# Altium PCB PCB1.PcbDoc (part 2 of 3)
Units mm, origin at the board's own origin, x right, y up, seen from the top; angles counter-clockwise.
Board outline 100 x 100 mm, 2 copper layers (Top Layer, Bottom Layer); 16 components, 62 nets, 154 pads, 113 vias.
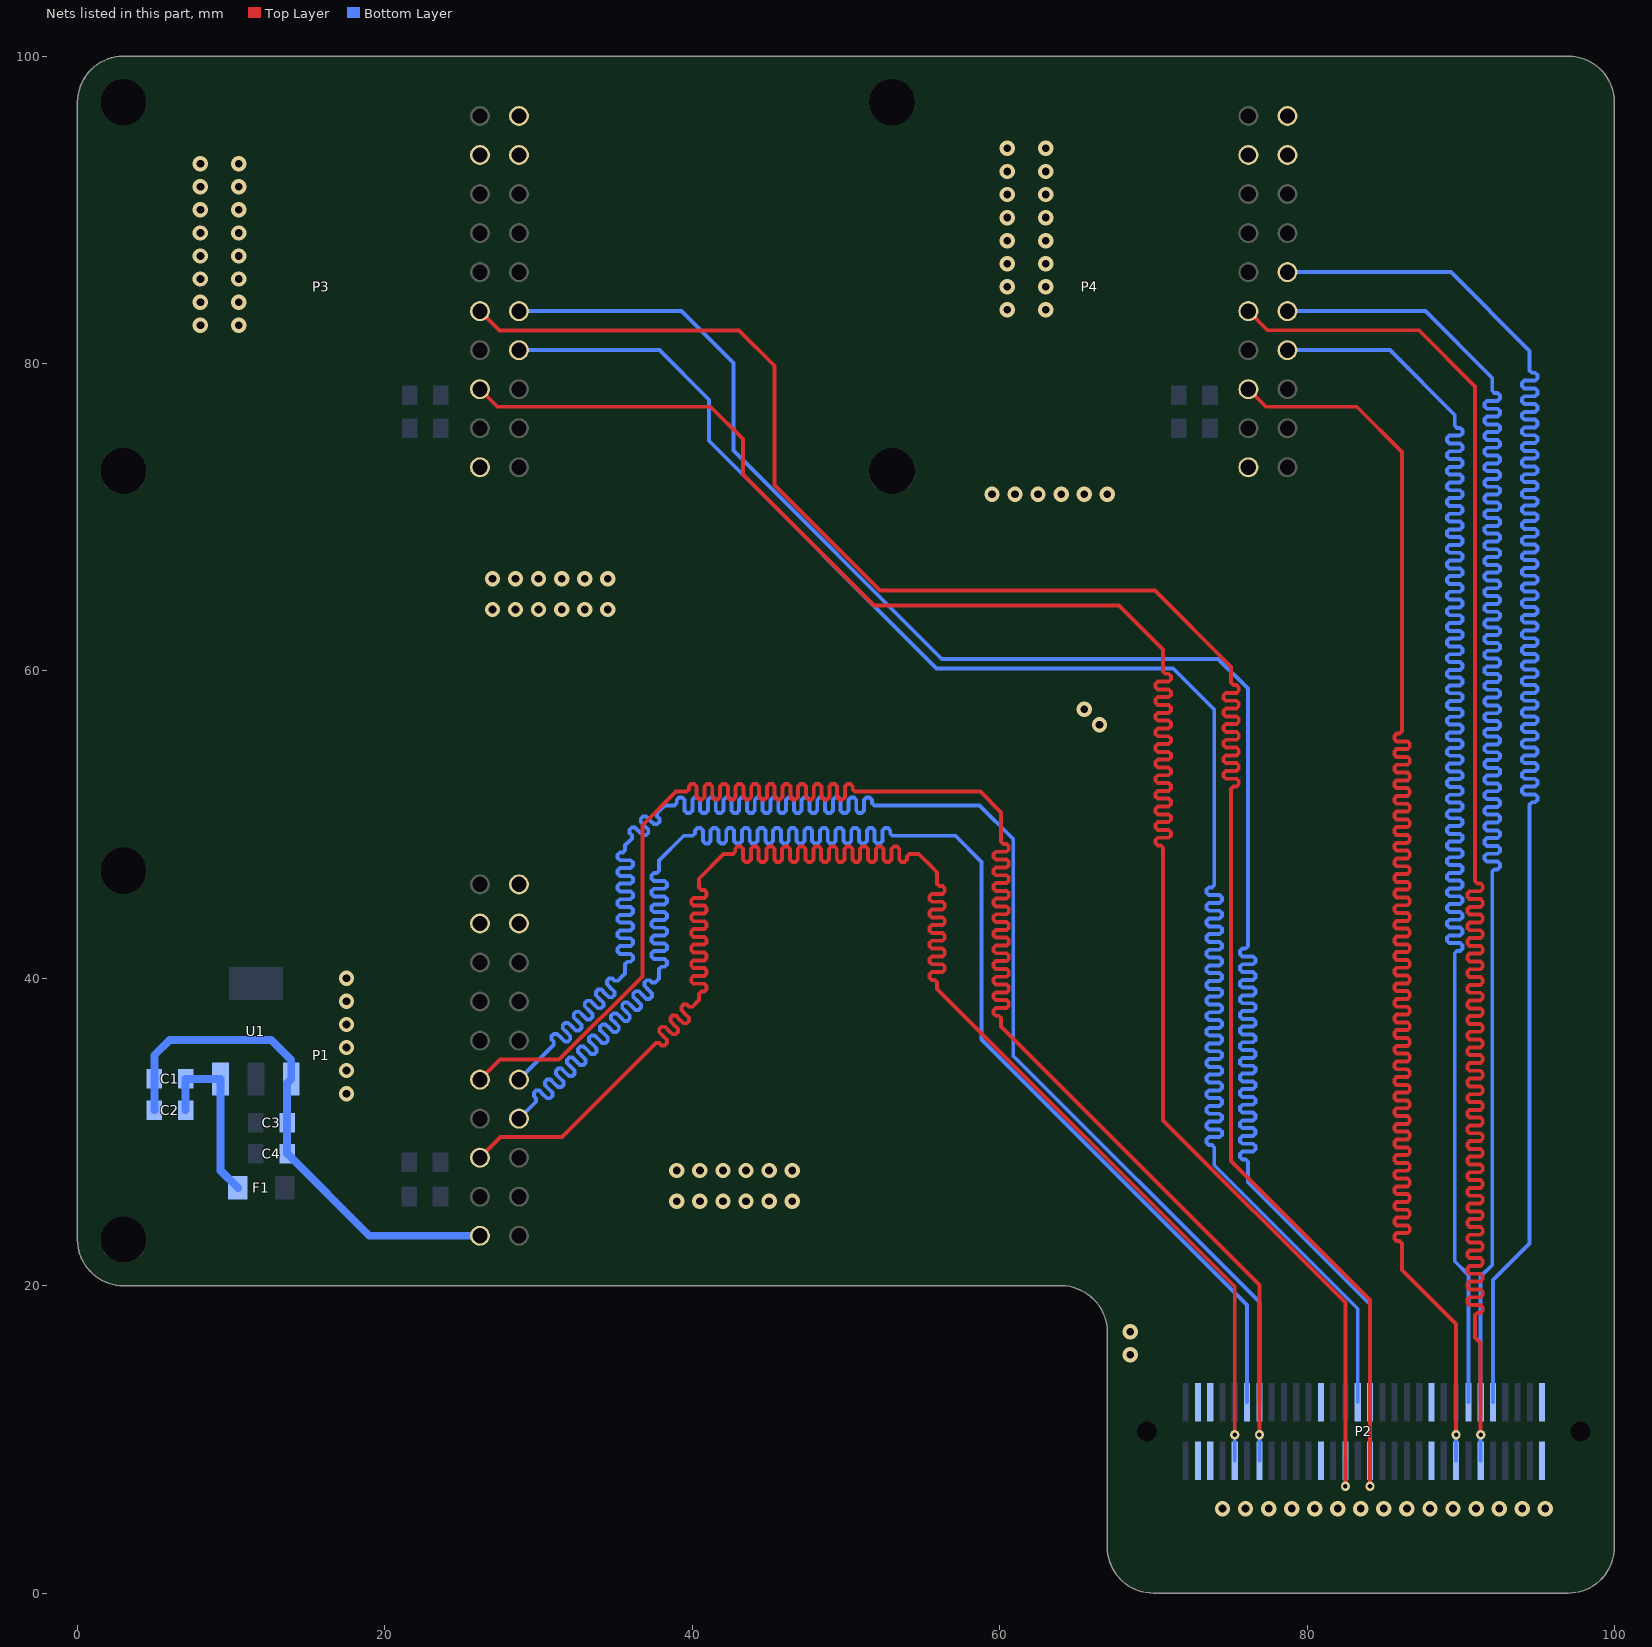
[diagram p2: the nets of this part, all layers, seen from the top]

## Via types
v1: diameter 1, hole 0.5, Top Layer to Bottom Layer, 87 vias
v2: diameter 0.6, hole 0.3, Top Layer to Bottom Layer, 22 vias
v3: diameter 0.8, hole 0.4, Top Layer to Bottom Layer, 2 vias
v4: diameter 3, hole 3, Top Layer to Bottom Layer, 2 vias

## Nets (pads, with @x,y where several pads share a name; then routed paths per layer and width w, separated by ;. In a path a pad name is that pad's centre, name@x,y a point inside that pad or via, vN(x,y) a via of type N, cw(c..) or ccw(c..) an arc to the next point about the centre after c; other vN are vias at no path point) (continued)
D5_3: P2.51 P4.11 | length 132.3
  Bottom Layer w0.254: P4.11@78.727,85.951 89.36,85.951 94.488,80.823 94.488,79.654 94.488,79.553 94.64,79.4 94.836,79.4 94.988,79.248 94.988,79.045 94.836,78.892 94.488,78.892 94.14,78.892 93.988,78.74 93.988,78.537 94.14,78.384 94.488,78.384 94.836,78.384 94.988,78.232 94.988,78.029 94.836,77.876 94.488,77.876 94.14,77.876 93.988,77.724 93.988,77.521 94.14,77.368 94.488,77.368 94.836,77.368 94.988,77.216 94.988,77.013 94.836,76.86 94.488,76.86 94.14,76.86 93.988,76.708 93.988,76.505 94.14,76.352 94.488,76.352 94.836,76.352 94.988,76.2 94.988,75.997 94.836,75.844 94.488,75.844 94.14,75.844 93.988,75.692 93.988,75.489 94.14,75.336 94.488,75.336 94.836,75.336 94.988,75.184 94.988,74.981 94.836,74.828 94.488,74.828 94.14,74.828 93.988,74.676 93.988,74.473 94.14,74.32 94.488,74.32 94.836,74.32 94.988,74.168 94.988,73.965 94.836,73.812 94.488,73.812 94.14,73.812 93.988,73.66 93.988,73.457 94.14,73.304 94.488,73.304 94.836,73.304 94.988,73.152 94.988,72.949 94.836,72.796 94.488,72.796 94.14,72.796 93.988,72.644 93.988,72.441 94.14,72.288 94.488,72.288 94.836,72.288 94.988,72.136 94.988,71.933 94.836,71.78 94.488,71.78 94.14,71.78 93.988,71.628 93.988,71.425 94.14,71.272 94.488,71.272 94.836,71.272 94.988,71.12 94.988,70.917 94.836,70.764 94.488,70.764 94.14,70.764 93.988,70.612 93.988,70.409 94.14,70.256 94.488,70.256 94.836,70.256 94.988,70.104 94.988,69.901 94.836,69.748 94.488,69.748 94.14,69.748 93.988,69.596 93.988,69.393 94.14,69.24 94.488,69.24 94.836,69.24 94.988,69.088 94.988,68.885 94.836,68.732 94.488,68.732 94.14,68.732 93.988,68.58 93.988,68.377 94.14,68.224 94.488,68.224 94.836,68.224 94.988,68.072 94.988,67.869 94.836,67.716 94.488,67.716 94.14,67.716 93.988,67.564 93.988,67.361 94.14,67.208 94.488,67.208 94.836,67.208 94.988,67.056 94.988,66.853 94.836,66.7 94.488,66.7 94.14,66.7 93.988,66.548 93.988,66.345 94.14,66.192 94.488,66.192 94.836,66.192 94.988,66.04 94.988,65.837 94.836,65.684 94.488,65.684 94.14,65.684 93.988,65.532 93.988,65.329 94.14,65.176 94.488,65.176 94.836,65.176 94.988,65.024 94.988,64.821 94.836,64.668 94.488,64.668 94.14,64.668 93.988,64.516 93.988,64.313 94.14,64.16 94.488,64.16 94.836,64.16 94.988,64.008 94.988,63.805 94.836,63.652 94.488,63.652 94.14,63.652 93.988,63.5 93.988,63.297 94.14,63.144 94.488,63.144 94.836,63.144 94.988,62.992 94.988,62.789 94.836,62.636 94.488,62.636 94.14,62.636 93.988,62.484 93.988,62.281 94.14,62.128 94.488,62.128 94.836,62.128 94.988,61.976 94.988,61.773 94.836,61.62 94.488,61.62 94.14,61.62 93.988,61.468 93.988,61.265 94.14,61.112 94.488,61.112 94.836,61.112 94.988,60.96 94.988,60.757 94.836,60.604 94.488,60.604 94.14,60.604 93.988,60.452 93.988,60.249 94.14,60.096 94.488,60.096 94.836,60.096 94.988,59.944 94.988,59.741 94.836,59.588 94.488,59.588 94.14,59.588 93.988,59.436 93.988,59.233 94.14,59.08 94.488,59.08 94.836,59.08 94.988,58.928 94.988,58.725 94.836,58.572 94.488,58.572 94.14,58.572 93.988,58.42 93.988,58.217 94.14,58.064 94.488,58.064 94.836,58.064 94.988,57.912 94.988,57.709 94.836,57.556 94.488,57.556 94.14,57.556 93.988,57.404 93.988,57.201 94.14,57.048 94.488,57.048 94.836,57.048 94.988,56.896 94.988,56.693 94.836,56.54 94.488,56.54 94.14,56.54 93.988,56.388 93.988,56.185 94.14,56.032 94.488,56.032 94.836,56.032 94.988,55.88 94.988,55.677 94.836,55.524 94.488,55.524 94.14,55.524 93.988,55.372 93.988,55.169 94.14,55.016 94.488,55.016 94.836,55.016 94.988,54.864 94.988,54.661 94.836,54.508 94.488,54.508 94.14,54.508 93.988,54.356 93.988,54.153 94.14,54 94.488,54 94.836,54 94.988,53.848 94.988,53.645 94.836,53.492 94.488,53.492 94.14,53.492 93.988,53.34 93.988,53.137 94.14,52.984 94.488,52.984 94.836,52.984 94.988,52.832 94.988,52.629 94.836,52.476 94.488,52.476 94.14,52.476 93.988,52.324 93.988,52.121 94.14,51.968 94.488,51.968 94.836,51.968 94.988,51.816 94.988,51.613 94.836,51.46 94.64,51.46 94.488,51.308 94.488,47.65 94.488,22.758 92.1,20.37 P2.51@92.1,12.425
D6_1: P1.10 P2.14 | length 132.1
  Top Layer w0.254: P1.10@26.187,33.411 27.498,34.722 31.344,34.722 36.754,40.132 36.754,49.962 38.938,52.146 39.522,52.146 39.624,52.146 39.776,52.299 39.776,52.494 39.929,52.646 40.132,52.646 40.284,52.494 40.284,52.146 40.284,51.799 40.437,51.646 40.64,51.646 40.792,51.799 40.792,52.146 40.792,52.494 40.945,52.646 41.148,52.646 41.3,52.494 41.3,52.146 41.3,51.799 41.453,51.646 41.656,51.646 41.808,51.799 41.808,52.146 41.808,52.494 41.961,52.646 42.164,52.646 42.316,52.494 42.316,52.146 42.316,51.799 42.469,51.646 42.672,51.646 42.824,51.799 42.824,52.146 42.824,52.494 42.977,52.646 43.18,52.646 43.332,52.494 43.332,52.146 43.332,51.799 43.485,51.646 43.688,51.646 43.84,51.799 43.84,52.146 43.84,52.494 43.993,52.646 44.196,52.646 44.348,52.494 44.348,52.146 44.348,51.799 44.501,51.646 44.704,51.646 44.856,51.799 44.856,52.146 44.856,52.494 45.009,52.646 45.212,52.646 45.364,52.494 45.364,52.146 45.364,51.799 45.517,51.646 45.72,51.646 45.872,51.799 45.872,52.146 45.872,52.494 46.025,52.646 46.228,52.646 46.38,52.494 46.38,52.146 46.38,51.799 46.533,51.646 46.736,51.646 46.888,51.799 46.888,52.146 46.888,52.494 47.041,52.646 47.244,52.646 47.396,52.494 47.396,52.146 47.396,51.799 47.549,51.646 47.752,51.646 47.904,51.799 47.904,52.146 47.904,52.494 48.057,52.646 48.26,52.646 48.412,52.494 48.412,52.146 48.412,51.799 48.565,51.646 48.768,51.646 48.92,51.799 48.92,52.146 48.92,52.494 49.073,52.646 49.276,52.646 49.428,52.494 49.428,52.146 49.428,51.799 49.581,51.646 49.784,51.646 49.936,51.799 49.936,52.146 49.936,52.494 50.089,52.646 50.292,52.646 50.444,52.494 50.444,52.299 50.597,52.146 53.289,52.146 58.75,52.146 60.096,50.8 60.096,49.555 60.096,48.895 60.249,48.743 60.444,48.743 60.596,48.59 60.596,48.387 60.444,48.235 60.096,48.235 59.749,48.235 59.596,48.082 59.596,47.879 59.749,47.727 60.096,47.727 60.444,47.727 60.596,47.574 60.596,47.371 60.444,47.219 60.096,47.219 59.749,47.219 59.596,47.066 59.596,46.863 59.749,46.711 60.096,46.711 60.444,46.711 60.596,46.558 60.596,46.355 60.444,46.203 60.096,46.203 59.749,46.203 59.596,46.05 59.596,45.847 59.749,45.695 60.096,45.695 60.444,45.695 60.596,45.542 60.596,45.339 60.444,45.187 60.096,45.187 59.749,45.187 59.596,45.034 59.596,44.831 59.749,44.679 60.096,44.679 60.444,44.679 60.596,44.526 60.596,44.323 60.444,44.171 60.096,44.171 59.749,44.171 59.596,44.018 59.596,43.815 59.749,43.663 60.096,43.663 60.444,43.663 60.596,43.51 60.596,43.307 60.444,43.155 60.096,43.155 59.749,43.155 59.596,43.002 59.596,42.799 59.749,42.647 60.096,42.647 60.444,42.647 60.596,42.494 60.596,42.291 60.444,42.139 60.096,42.139 59.749,42.139 59.596,41.986 59.596,41.783 59.749,41.631 60.096,41.631 60.444,41.631 60.596,41.478 60.596,41.275 60.444,41.123 60.096,41.123 59.749,41.123 59.596,40.97 59.596,40.767 59.749,40.615 60.096,40.615 60.444,40.615 60.596,40.462 60.596,40.259 60.444,40.107 60.096,40.107 59.749,40.107 59.596,39.954 59.596,39.751 59.749,39.599 60.096,39.599 60.444,39.599 60.596,39.446 60.596,39.243 60.444,39.091 60.096,39.091 59.749,39.091 59.596,38.938 59.596,38.735 59.749,38.583 60.096,38.583 60.444,38.583 60.596,38.43 60.596,38.227 60.444,38.075 60.096,38.075 59.749,38.075 59.596,37.922 59.596,37.719 59.749,37.567 59.944,37.567 60.096,37.414 60.096,37.313 60.096,36.855 76.9,20.052 v2(76.9,10.302)
  Bottom Layer w0.254: P2.14@76.9,8.625 v2(76.9,10.302)
D6_2: P2.32 P3.10 | length 132.3
  Top Layer w0.254: P3.10@26.187,83.411 27.455,82.144 43.053,82.144 45.339,79.858 45.339,72.092 52.204,65.227 70.104,65.227 75.057,60.274 75.057,59.334 75.057,59.233 75.209,59.08 75.405,59.08 75.557,58.928 75.557,58.725 75.405,58.572 75.057,58.572 74.709,58.572 74.557,58.42 74.557,58.217 74.709,58.064 75.057,58.064 75.405,58.064 75.557,57.912 75.557,57.709 75.405,57.556 75.057,57.556 74.709,57.556 74.557,57.404 74.557,57.201 74.709,57.048 75.057,57.048 75.405,57.048 75.557,56.896 75.557,56.693 75.405,56.54 75.057,56.54 74.709,56.54 74.557,56.388 74.557,56.185 74.709,56.032 75.057,56.032 75.405,56.032 75.557,55.88 75.557,55.677 75.405,55.524 75.057,55.524 74.709,55.524 74.557,55.372 74.557,55.169 74.709,55.016 75.057,55.016 75.405,55.016 75.557,54.864 75.557,54.661 75.405,54.508 75.057,54.508 74.709,54.508 74.557,54.356 74.557,54.153 74.709,54 75.057,54 75.405,54 75.557,53.848 75.557,53.645 75.405,53.492 75.057,53.492 74.709,53.492 74.557,53.34 74.557,53.137 74.709,52.984 75.057,52.984 75.405,52.984 75.557,52.832 75.557,52.629 75.405,52.476 75.209,52.476 75.057,52.324 75.057,50.114 75.057,28.118 84.1,19.075 v2(84.1,6.948)
  Bottom Layer w0.254: v2(84.1,6.948) P2.32@84.1,8.625
D6_3: P2.50 P4.10 | length 131.8
  Top Layer w0.254: P4.10@76.187,83.411 77.43,82.169 87.274,82.169 90.932,78.511 90.932,48.285 90.932,46.33 91.084,46.177 91.28,46.177 91.432,46.025 91.432,45.822 91.28,45.669 90.932,45.669 90.584,45.669 90.432,45.517 90.432,45.314 90.584,45.161 90.932,45.161 91.28,45.161 91.432,45.009 91.432,44.806 91.28,44.653 90.932,44.653 90.584,44.653 90.432,44.501 90.432,44.298 90.584,44.145 90.932,44.145 91.28,44.145 91.432,43.993 91.432,43.79 91.28,43.637 90.932,43.637 90.584,43.637 90.432,43.485 90.432,43.282 90.584,43.129 90.932,43.129 91.28,43.129 91.432,42.977 91.432,42.774 91.28,42.621 90.932,42.621 90.584,42.621 90.432,42.469 90.432,42.266 90.584,42.113 90.932,42.113 91.28,42.113 91.432,41.961 91.432,41.758 91.28,41.605 90.932,41.605 90.584,41.605 90.432,41.453 90.432,41.25 90.584,41.097 90.932,41.097 91.28,41.097 91.432,40.945 91.432,40.742 91.28,40.589 90.932,40.589 90.584,40.589 90.432,40.437 90.432,40.234 90.584,40.081 90.932,40.081 91.28,40.081 91.432,39.929 91.432,39.726 91.28,39.573 90.932,39.573 90.584,39.573 90.432,39.421 90.432,39.218 90.584,39.065 90.932,39.065 91.28,39.065 91.432,38.913 91.432,38.71 91.28,38.557 90.932,38.557 90.584,38.557 90.432,38.405 90.432,38.202 90.584,38.049 90.932,38.049 91.28,38.049 91.432,37.897 91.432,37.694 91.28,37.541 90.932,37.541 90.584,37.541 90.432,37.389 90.432,37.186 90.584,37.033 90.932,37.033 91.28,37.033 91.432,36.881 91.432,36.678 91.28,36.525 90.932,36.525 90.584,36.525 90.432,36.373 90.432,36.17 90.584,36.017 90.932,36.017 91.28,36.017 91.432,35.865 91.432,35.662 91.28,35.509 90.932,35.509 90.584,35.509 90.432,35.357 90.432,35.154 90.584,35.001 90.932,35.001 91.28,35.001 91.432,34.849 91.432,34.646 91.28,34.493 90.932,34.493 90.584,34.493 90.432,34.341 90.432,34.138 90.584,33.985 90.932,33.985 91.28,33.985 91.432,33.833 91.432,33.63 91.28,33.477 90.932,33.477 90.584,33.477 90.432,33.325 90.432,33.122 90.584,32.969 90.932,32.969 91.28,32.969 91.432,32.817 91.432,32.614 91.28,32.461 90.932,32.461 90.584,32.461 90.432,32.309 90.432,32.106 90.584,31.953 90.932,31.953 91.28,31.953 91.432,31.801 91.432,31.598 91.28,31.445 90.932,31.445 90.584,31.445 90.432,31.293 90.432,31.09 90.584,30.937 90.932,30.937 91.28,30.937 91.432,30.785 91.432,30.582 91.28,30.429 90.932,30.429 90.584,30.429 90.432,30.277 90.432,30.074 90.584,29.921 90.932,29.921 91.28,29.921 91.432,29.769 91.432,29.566 91.28,29.413 90.932,29.413 90.584,29.413 90.432,29.261 90.432,29.058 90.584,28.905 90.932,28.905 91.28,28.905 91.432,28.753 91.432,28.55 91.28,28.397 90.932,28.397 90.584,28.397 90.432,28.245 90.432,28.042 90.584,27.889 90.932,27.889 91.28,27.889 91.432,27.737 91.432,27.534 91.28,27.381 90.932,27.381 90.584,27.381 90.432,27.229 90.432,27.026 90.584,26.873 90.932,26.873 91.28,26.873 91.432,26.721 91.432,26.518 91.28,26.365 90.932,26.365 90.584,26.365 90.432,26.213 90.432,26.01 90.584,25.857 90.932,25.857 91.28,25.857 91.432,25.705 91.432,25.502 91.28,25.349 90.932,25.349 90.584,25.349 90.432,25.197 90.432,24.994 90.584,24.841 90.932,24.841 91.28,24.841 91.432,24.689 91.432,24.486 91.28,24.333 90.932,24.333 90.584,24.333 90.432,24.181 90.432,23.978 90.584,23.825 90.932,23.825 91.28,23.825 91.432,23.673 91.432,23.47 91.28,23.317 90.932,23.317 90.584,23.317 90.432,23.165 90.432,22.962 90.584,22.809 90.932,22.809 91.28,22.809 91.432,22.657 91.432,22.454 91.28,22.301 90.932,22.301 90.584,22.301 90.432,22.149 90.432,21.946 90.584,21.793 90.932,21.793 91.28,21.793 91.432,21.641 91.432,21.438 91.28,21.285 90.932,21.285 90.584,21.285 90.432,21.133 90.432,20.93 90.584,20.777 90.932,20.777 91.28,20.777 91.432,20.625 91.432,20.422 91.28,20.269 90.932,20.269 90.584,20.269 90.432,20.117 90.432,19.914 90.584,19.761 90.932,19.761 91.28,19.761 91.432,19.609 91.432,19.406 91.28,19.253 90.932,19.253 90.584,19.253 90.432,19.101 90.432,18.898 90.584,18.745 90.932,18.745 91.28,18.745 91.432,18.593 91.432,18.39 91.28,18.237 91.084,18.237 90.932,18.085 90.932,17.729 90.932,17.475 90.932,16.636 91.3,16.268 v2(91.3,10.302)
  Bottom Layer w0.254: P2.50@91.3,8.625 v2(91.3,10.302)
D7_1: P1.9 P2.13 | length 132.3
  Bottom Layer w0.254: P1.9@28.727,33.411 30.919,35.603 30.991,35.675 30.991,35.891 30.853,36.029 30.853,36.244 30.997,36.388 31.212,36.388 31.458,36.142 31.704,35.896 31.92,35.896 32.063,36.04 32.063,36.255 31.817,36.501 31.572,36.747 31.572,36.963 31.715,37.106 31.931,37.106 32.177,36.86 32.422,36.615 32.638,36.615 32.782,36.758 32.782,36.974 32.536,37.22 32.29,37.465 32.29,37.681 32.434,37.825 32.649,37.825 32.895,37.579 33.141,37.333 33.356,37.333 33.5,37.477 33.5,37.692 33.254,37.938 33.008,38.184 33.008,38.399 33.152,38.543 33.368,38.543 33.613,38.297 33.859,38.051 34.075,38.051 34.218,38.195 34.218,38.411 33.973,38.656 33.727,38.902 33.727,39.118 33.871,39.261 34.086,39.261 34.332,39.016 34.578,38.77 34.793,38.77 34.937,38.914 34.937,39.129 34.691,39.375 34.445,39.621 34.445,39.836 34.589,39.98 34.805,39.98 34.943,39.842 35.158,39.842 35.41,40.093 35.636,40.32 35.636,40.574 35.636,40.93 35.789,41.082 35.984,41.082 36.136,41.234 36.136,41.438 35.984,41.59 35.636,41.59 35.289,41.59 35.136,41.742 35.136,41.946 35.289,42.098 35.636,42.098 35.984,42.098 36.136,42.25 36.136,42.454 35.984,42.606 35.636,42.606 35.289,42.606 35.136,42.758 35.136,42.962 35.289,43.114 35.636,43.114 35.984,43.114 36.136,43.266 36.136,43.47 35.984,43.622 35.636,43.622 35.289,43.622 35.136,43.774 35.136,43.978 35.289,44.13 35.636,44.13 35.984,44.13 36.136,44.282 36.136,44.486 35.984,44.638 35.636,44.638 35.289,44.638 35.136,44.79 35.136,44.994 35.289,45.146 35.636,45.146 35.984,45.146 36.136,45.298 36.136,45.502 35.984,45.654 35.636,45.654 35.289,45.654 35.136,45.806 35.136,46.01 35.289,46.162 35.636,46.162 35.984,46.162 36.136,46.314 36.136,46.518 35.984,46.67 35.636,46.67 35.289,46.67 35.136,46.822 35.136,47.026 35.289,47.178 35.636,47.178 35.984,47.178 36.136,47.33 36.136,47.534 35.984,47.686 35.636,47.686 35.289,47.686 35.136,47.838 35.136,48.042 35.289,48.194 35.484,48.194 35.636,48.346 35.636,48.666 35.816,48.846 36.067,49.097 36.067,49.313 35.929,49.451 35.929,49.667 36.073,49.81 36.288,49.81 36.534,49.564 36.78,49.319 36.996,49.319 37.139,49.462 37.139,49.678 36.893,49.924 36.648,50.169 36.648,50.385 36.791,50.529 37.007,50.529 37.253,50.283 37.498,50.037 37.714,50.037 37.858,50.181 37.858,50.396 37.72,50.534 37.72,50.75 37.971,51.001 38.227,51.257 38.481,51.257 38.837,51.257 38.989,51.41 38.989,51.605 39.141,51.757 39.345,51.757 39.497,51.605 39.497,51.257 39.497,50.91 39.649,50.757 39.853,50.757 40.005,50.91 40.005,51.257 40.005,51.605 40.157,51.757 40.361,51.757 40.513,51.605 40.513,51.257 40.513,50.91 40.665,50.757 40.869,50.757 41.021,50.91 41.021,51.257 41.021,51.605 41.173,51.757 41.377,51.757 41.529,51.605 41.529,51.257 41.529,50.91 41.681,50.757 41.885,50.757 42.037,50.91 42.037,51.257 42.037,51.605 42.189,51.757 42.393,51.757 42.545,51.605 42.545,51.257 42.545,50.91 42.697,50.757 42.901,50.757 43.053,50.91 43.053,51.257 43.053,51.605 43.205,51.757 43.409,51.757 43.561,51.605 43.561,51.257 43.561,50.91 43.713,50.757 43.917,50.757 44.069,50.91 44.069,51.257 44.069,51.605 44.221,51.757 44.425,51.757 44.577,51.605 44.577,51.257 44.577,50.91 44.729,50.757 44.933,50.757 45.085,50.91 45.085,51.257 45.085,51.605 45.237,51.757 45.441,51.757 45.593,51.605 45.593,51.257 45.593,50.91 45.745,50.757 45.949,50.757 46.101,50.91 46.101,51.257 46.101,51.605 46.253,51.757 46.457,51.757 46.609,51.605 46.609,51.257 46.609,50.91 46.761,50.757 46.965,50.757 47.117,50.91 47.117,51.257 47.117,51.605 47.269,51.757 47.473,51.757 47.625,51.605 47.625,51.257 47.625,50.91 47.777,50.757 47.981,50.757 48.133,50.91 48.133,51.257 48.133,51.605 48.285,51.757 48.489,51.757 48.641,51.605 48.641,51.257 48.641,50.91 48.793,50.757 48.997,50.757 49.149,50.91 49.149,51.257 49.149,51.605 49.301,51.757 49.505,51.757 49.657,51.605 49.657,51.257 49.657,50.91 49.809,50.757 50.013,50.757 50.165,50.91 50.165,51.257 50.165,51.605 50.317,51.757 50.521,51.757 50.673,51.605 50.673,51.257 50.673,50.91 50.825,50.757 51.029,50.757 51.181,50.91 51.181,51.257 51.181,51.605 51.333,51.757 51.537,51.757 51.689,51.605 51.689,51.41 51.841,51.257 55.982,51.257 58.699,51.257 60.884,49.073 60.884,34.95 76.9,18.934 P2.13@76.9,12.425
D7_2: P2.31 P3.9 | length 132.6
  Bottom Layer w0.254: P3.9@28.727,83.411 39.296,83.411 42.672,80.035 42.672,74.346 56.236,60.782 74.219,60.782 76.149,58.852 76.149,42.723 76.149,42.088 75.997,41.935 75.802,41.935 75.649,41.783 75.649,41.58 75.802,41.427 76.149,41.427 76.497,41.427 76.649,41.275 76.649,41.072 76.497,40.919 76.149,40.919 75.802,40.919 75.649,40.767 75.649,40.564 75.802,40.411 76.149,40.411 76.497,40.411 76.649,40.259 76.649,40.056 76.497,39.903 76.149,39.903 75.802,39.903 75.649,39.751 75.649,39.548 75.802,39.395 76.149,39.395 76.497,39.395 76.649,39.243 76.649,39.04 76.497,38.887 76.149,38.887 75.802,38.887 75.649,38.735 75.649,38.532 75.802,38.379 76.149,38.379 76.497,38.379 76.649,38.227 76.649,38.024 76.497,37.871 76.149,37.871 75.802,37.871 75.649,37.719 75.649,37.516 75.802,37.363 76.149,37.363 76.497,37.363 76.649,37.211 76.649,37.008 76.497,36.855 76.149,36.855 75.802,36.855 75.649,36.703 75.649,36.5 75.802,36.347 76.149,36.347 76.497,36.347 76.649,36.195 76.649,35.992 76.497,35.839 76.149,35.839 75.802,35.839 75.649,35.687 75.649,35.484 75.802,35.331 76.149,35.331 76.497,35.331 76.649,35.179 76.649,34.976 76.497,34.823 76.149,34.823 75.802,34.823 75.649,34.671 75.649,34.468 75.802,34.315 76.149,34.315 76.497,34.315 76.649,34.163 76.649,33.96 76.497,33.807 76.149,33.807 75.802,33.807 75.649,33.655 75.649,33.452 75.802,33.299 76.149,33.299 76.497,33.299 76.649,33.147 76.649,32.944 76.497,32.791 76.149,32.791 75.802,32.791 75.649,32.639 75.649,32.436 75.802,32.283 76.149,32.283 76.497,32.283 76.649,32.131 76.649,31.928 76.497,31.775 76.149,31.775 75.802,31.775 75.649,31.623 75.649,31.42 75.802,31.267 76.149,31.267 76.497,31.267 76.649,31.115 76.649,30.912 76.497,30.759 76.149,30.759 75.802,30.759 75.649,30.607 75.649,30.404 75.802,30.251 76.149,30.251 76.497,30.251 76.649,30.099 76.649,29.896 76.497,29.743 76.149,29.743 75.802,29.743 75.649,29.591 75.649,29.388 75.802,29.235 76.149,29.235 76.497,29.235 76.649,29.083 76.649,28.88 76.497,28.727 76.149,28.727 75.802,28.727 75.649,28.575 75.649,28.372 75.802,28.219 75.997,28.219 76.149,28.067 76.149,27.965 76.149,26.746 84.1,18.795 P2.31@84.1,12.425
D7_3: P2.49 P4.9 | length 132
  Bottom Layer w0.254: P4.9@78.727,83.411 87.709,83.411 92.05,79.07 92.05,78.334 92.05,78.232 92.202,78.08 92.397,78.08 92.55,77.927 92.55,77.724 92.397,77.572 92.05,77.572 91.702,77.572 91.55,77.419 91.55,77.216 91.702,77.064 92.05,77.064 92.397,77.064 92.55,76.911 92.55,76.708 92.397,76.556 92.05,76.556 91.702,76.556 91.55,76.403 91.55,76.2 91.702,76.048 92.05,76.048 92.397,76.048 92.55,75.895 92.55,75.692 92.397,75.54 92.05,75.54 91.702,75.54 91.55,75.387 91.55,75.184 91.702,75.032 92.05,75.032 92.397,75.032 92.55,74.879 92.55,74.676 92.397,74.524 92.05,74.524 91.702,74.524 91.55,74.371 91.55,74.168 91.702,74.016 92.05,74.016 92.397,74.016 92.55,73.863 92.55,73.66 92.397,73.508 92.05,73.508 91.702,73.508 91.55,73.355 91.55,73.152 91.702,73 92.05,73 92.397,73 92.55,72.847 92.55,72.644 92.397,72.492 92.05,72.492 91.702,72.492 91.55,72.339 91.55,72.136 91.702,71.984 92.05,71.984 92.397,71.984 92.55,71.831 92.55,71.628 92.397,71.476 92.05,71.476 91.702,71.476 91.55,71.323 91.55,71.12 91.702,70.968 92.05,70.968 92.397,70.968 92.55,70.815 92.55,70.612 92.397,70.46 92.05,70.46 91.702,70.46 91.55,70.307 91.55,70.104 91.702,69.952 92.05,69.952 92.397,69.952 92.55,69.799 92.55,69.596 92.397,69.444 92.05,69.444 91.702,69.444 91.55,69.291 91.55,69.088 91.702,68.936 92.05,68.936 92.397,68.936 92.55,68.783 92.55,68.58 92.397,68.428 92.05,68.428 91.702,68.428 91.55,68.275 91.55,68.072 91.702,67.92 92.05,67.92 92.397,67.92 92.55,67.767 92.55,67.564 92.397,67.412 92.05,67.412 91.702,67.412 91.55,67.259 91.55,67.056 91.702,66.904 92.05,66.904 92.397,66.904 92.55,66.751 92.55,66.548 92.397,66.396 92.05,66.396 91.702,66.396 91.55,66.243 91.55,66.04 91.702,65.888 92.05,65.888 92.397,65.888 92.55,65.735 92.55,65.532 92.397,65.38 92.05,65.38 91.702,65.38 91.55,65.227 91.55,65.024 91.702,64.872 92.05,64.872 92.397,64.872 92.55,64.719 92.55,64.516 92.397,64.364 92.05,64.364 91.702,64.364 91.55,64.211 91.55,64.008 91.702,63.856 92.05,63.856 92.397,63.856 92.55,63.703 92.55,63.5 92.397,63.348 92.05,63.348 91.702,63.348 91.55,63.195 91.55,62.992 91.702,62.84 92.05,62.84 92.397,62.84 92.55,62.687 92.55,62.484 92.397,62.332 92.05,62.332 91.702,62.332 91.55,62.179 91.55,61.976 91.702,61.824 92.05,61.824 92.397,61.824 92.55,61.671 92.55,61.468 92.397,61.316 92.05,61.316 91.702,61.316 91.55,61.163 91.55,60.96 91.702,60.808 92.05,60.808 92.397,60.808 92.55,60.655 92.55,60.452 92.397,60.3 92.05,60.3 91.702,60.3 91.55,60.147 91.55,59.944 91.702,59.792 92.05,59.792 92.397,59.792 92.55,59.639 92.55,59.436 92.397,59.284 92.05,59.284 91.702,59.284 91.55,59.131 91.55,58.928 91.702,58.776 92.05,58.776 92.397,58.776 92.55,58.623 92.55,58.42 92.397,58.268 92.05,58.268 91.702,58.268 91.55,58.115 91.55,57.912 91.702,57.76 92.05,57.76 92.397,57.76 92.55,57.607 92.55,57.404 92.397,57.252 92.05,57.252 91.702,57.252 91.55,57.099 91.55,56.896 91.702,56.744 92.05,56.744 92.397,56.744 92.55,56.591 92.55,56.388 92.397,56.236 92.05,56.236 91.702,56.236 91.55,56.083 91.55,55.88 91.702,55.728 92.05,55.728 92.397,55.728 92.55,55.575 92.55,55.372 92.397,55.22 92.05,55.22 91.702,55.22 91.55,55.067 91.55,54.864 91.702,54.712 92.05,54.712 92.397,54.712 92.55,54.559 92.55,54.356 92.397,54.204 92.05,54.204 91.702,54.204 91.55,54.051 91.55,53.848 91.702,53.696 92.05,53.696 92.397,53.696 92.55,53.543 92.55,53.34 92.397,53.188 92.05,53.188 91.702,53.188 91.55,53.035 91.55,52.832 91.702,52.68 92.05,52.68 92.397,52.68 92.55,52.527 92.55,52.324 92.397,52.172 92.05,52.172 91.702,52.172 91.55,52.019 91.55,51.816 91.702,51.664 92.05,51.664 92.397,51.664 92.55,51.511 92.55,51.308 92.397,51.156 92.05,51.156 91.702,51.156 91.55,51.003 91.55,50.8 91.702,50.648 92.05,50.648 92.397,50.648 92.55,50.495 92.55,50.292 92.397,50.14 92.05,50.14 91.702,50.14 91.55,49.987 91.55,49.784 91.702,49.632 92.05,49.632 92.397,49.632 92.55,49.479 92.55,49.276 92.397,49.124 92.05,49.124 91.702,49.124 91.55,48.971 91.55,48.768 91.702,48.616 92.05,48.616 92.397,48.616 92.55,48.463 92.55,48.26 92.397,48.108 92.05,48.108 91.702,48.108 91.55,47.955 91.55,47.752 91.702,47.6 92.05,47.6 92.397,47.6 92.55,47.447 92.55,47.244 92.397,47.092 92.202,47.092 92.05,46.939 92.05,45.568 92.05,21.361 91.3,20.612 P2.49@91.3,12.425
FREX_1: P1.19
FREX_2: P3.19
FREX_3: P4.19
GND: C1.2 C2.1 C3.2 C4.1 P1.2 P2.3 P2.4 P2.5 P2.6 P2.23 P2.24 P2.41 P2.42 P2.59 P2.60 P3.2 P4.2 U1.1 | length 34.4
  Bottom Layer w0.508: C2.1@5.004,31.42 C1.2@5.004,33.452 5.004,35.001 5.994,35.992 12.598,35.992 13.908,34.682 U1.1@13.908,33.451 13.64,33.183 C3.2@13.64,30.607 C4.1@13.64,28.6 18.989,23.251 P1.2@26.187,23.251
  other v1: 74.5,5.5 76,5.5 77.5,5.5 79,5.5 80.5,5.5 82,5.5 83.5,5.5 85,5.5 86.5,5.5 88,5.5 89.5,5.5 91,5.5 92.5,5.5 94,5.5 95.5,5.5 68.5,15.5 68.5,17 39,25.5 40.5,25.5 42,25.5 43.5,25.5 45,25.5 46.5,25.5 39,27.5 40.5,27.5 42,27.5 43.5,27.5 45,27.5 46.5,27.5 17.5,32.5 17.5,34 17.5,35.5 17.5,37 17.5,38.5 17.5,40 66.5,56.5 65.5,57.5 27,64 28.5,64 30,64 31.5,64 33,64 34.5,64 27,66 28.5,66 30,66 31.5,66 33,66 34.5,66 59.5,71.5 61,71.5 62.5,71.5 64,71.5 65.5,71.5 67,71.5 8,82.5 10.5,82.5 60.5,83.5 63,83.5 8,84 10.5,84 60.5,85 63,85 8,85.5 10.5,85.5 60.5,86.5 63,86.5 8,87 10.5,87 60.5,88 63,88 8,88.5 10.5,88.5 60.5,89.5 63,89.5 8,90 10.5,90 60.5,91 63,91 8,91.5 10.5,91.5 60.5,92.5 63,92.5 8,93 10.5,93 60.5,94 63,94
HS_1: P1.6 P2.10 | length 132.2
  Top Layer w0.254: P1.6@26.187,28.331 27.523,29.667 31.521,29.667 37.49,35.636 37.635,35.781 37.85,35.781 37.989,35.643 38.204,35.643 38.348,35.786 38.348,36.002 38.102,36.248 37.856,36.494 37.856,36.709 38,36.853 38.215,36.853 38.461,36.607 38.707,36.361 38.922,36.361 39.066,36.505 39.066,36.72 38.82,36.966 38.575,37.212 38.575,37.427 38.718,37.571 38.934,37.571 39.18,37.325 39.425,37.08 39.641,37.08 39.785,37.223 39.785,37.439 39.539,37.685 39.293,37.93 39.293,38.146 39.437,38.29 39.652,38.29 39.79,38.152 40.006,38.152 40.257,38.403 40.437,38.583 40.437,38.633 40.437,38.989 40.589,39.141 40.784,39.141 40.937,39.294 40.937,39.497 40.784,39.649 40.437,39.649 40.089,39.649 39.937,39.802 39.937,40.005 40.089,40.157 40.437,40.157 40.784,40.157 40.937,40.31 40.937,40.513 40.784,40.665 40.437,40.665 40.089,40.665 39.937,40.818 39.937,41.021 40.089,41.173 40.437,41.173 40.784,41.173 40.937,41.326 40.937,41.529 40.784,41.681 40.437,41.681 40.089,41.681 39.937,41.834 39.937,42.037 40.089,42.189 40.437,42.189 40.784,42.189 40.937,42.342 40.937,42.545 40.784,42.697 40.437,42.697 40.089,42.697 39.937,42.85 39.937,43.053 40.089,43.205 40.437,43.205 40.784,43.205 40.937,43.358 40.937,43.561 40.784,43.713 40.437,43.713 40.089,43.713 39.937,43.866 39.937,44.069 40.089,44.221 40.437,44.221 40.784,44.221 40.937,44.374 40.937,44.577 40.784,44.729 40.437,44.729 40.089,44.729 39.937,44.882 39.937,45.085 40.089,45.237 40.437,45.237 40.784,45.237 40.937,45.39 40.937,45.593 40.784,45.745 40.589,45.745 40.437,45.898 40.437,45.999 40.437,46.482 42.037,48.082 42.367,48.082 42.647,48.082 42.799,48.235 42.799,48.43 42.951,48.582 43.155,48.582 43.307,48.43 43.307,48.082 43.307,47.735 43.459,47.582 43.663,47.582 43.815,47.735 43.815,48.082 43.815,48.43 43.967,48.582 44.171,48.582 44.323,48.43 44.323,48.082 44.323,47.735 44.475,47.582 44.679,47.582 44.831,47.735 44.831,48.082 44.831,48.43 44.983,48.582 45.187,48.582 45.339,48.43 45.339,48.082 45.339,47.735 45.491,47.582 45.695,47.582 45.847,47.735 45.847,48.082 45.847,48.43 45.999,48.582 46.203,48.582 46.355,48.43 46.355,48.082 46.355,47.735 46.507,47.582 46.711,47.582 46.863,47.735 46.863,48.082 46.863,48.43 47.015,48.582 47.219,48.582 47.371,48.43 47.371,48.082 47.371,47.735 47.523,47.582 47.727,47.582 47.879,47.735 47.879,48.082 47.879,48.43 48.031,48.582 48.235,48.582 48.387,48.43 48.387,48.082 48.387,47.735 48.539,47.582 48.743,47.582 48.895,47.735 48.895,48.082 48.895,48.43 49.047,48.582 49.251,48.582 49.403,48.43 49.403,48.082 49.403,47.735 49.555,47.582 49.759,47.582 49.911,47.735 49.911,48.082 49.911,48.43 50.063,48.582 50.267,48.582 50.419,48.43 50.419,48.082 50.419,47.735 50.571,47.582 50.775,47.582 50.927,47.735 50.927,48.082 50.927,48.43 51.079,48.582 51.283,48.582 51.435,48.43 51.435,48.082 51.435,47.735 51.587,47.582 51.791,47.582 51.943,47.735 51.943,48.082 51.943,48.43 52.095,48.582 52.299,48.582 52.451,48.43 52.451,48.082 52.451,47.735 52.603,47.582 52.807,47.582 52.959,47.735 52.959,48.082 52.959,48.43 53.111,48.582 53.315,48.582 53.467,48.43 53.467,48.082 53.467,47.735 53.619,47.582 53.823,47.582 53.975,47.735 53.975,47.93 54.127,48.082 54.483,48.082 54.737,48.082 55.033,47.786 55.392,47.427 55.751,47.068 55.931,46.888 55.931,46.507 55.931,46.152 56.083,45.999 56.278,45.999 56.431,45.847 56.431,45.644 56.278,45.491 55.931,45.491 55.583,45.491 55.431,45.339 55.431,45.136 55.583,44.983 55.931,44.983 56.278,44.983 56.431,44.831 56.431,44.628 56.278,44.475 55.931,44.475 55.583,44.475 55.431,44.323 55.431,44.12 55.583,43.967 55.931,43.967 56.278,43.967 56.431,43.815 56.431,43.612 56.278,43.459 55.931,43.459 55.583,43.459 55.431,43.307 55.431,43.104 55.583,42.951 55.931,42.951 56.278,42.951 56.431,42.799 56.431,42.596 56.278,42.443 55.931,42.443 55.583,42.443 55.431,42.291 55.431,42.088 55.583,41.935 55.931,41.935 56.278,41.935 56.431,41.783 56.431,41.58 56.278,41.427 55.931,41.427 55.583,41.427 55.431,41.275 55.431,41.072 55.583,40.919 55.931,40.919 56.278,40.919 56.431,40.767 56.431,40.564 56.278,40.411 55.931,40.411 55.583,40.411 55.431,40.259 55.431,40.056 55.583,39.903 55.778,39.903 55.931,39.751 55.931,39.649 55.931,39.319 75.3,19.95 v2(75.3,10.302)
  Bottom Layer w0.254: P2.10@75.3,8.625 v2(75.3,10.302)
HS_2: P2.28 P3.6 | length 131.7
  Top Layer w0.254: P3.6@26.187,78.331 27.328,77.191 41.199,77.191 43.307,75.082 43.307,72.778 51.826,64.259 67.77,64.259 70.637,61.392 70.637,60.071 70.637,59.969 70.79,59.817 70.985,59.817 71.137,59.665 71.137,59.461 70.985,59.309 70.637,59.309 70.29,59.309 70.137,59.157 70.137,58.953 70.29,58.801 70.637,58.801 70.985,58.801 71.137,58.649 71.137,58.445 70.985,58.293 70.637,58.293 70.29,58.293 70.137,58.141 70.137,57.937 70.29,57.785 70.637,57.785 70.985,57.785 71.137,57.633 71.137,57.429 70.985,57.277 70.637,57.277 70.29,57.277 70.137,57.125 70.137,56.921 70.29,56.769 70.637,56.769 70.985,56.769 71.137,56.617 71.137,56.413 70.985,56.261 70.637,56.261 70.29,56.261 70.137,56.109 70.137,55.905 70.29,55.753 70.637,55.753 70.985,55.753 71.137,55.601 71.137,55.397 70.985,55.245 70.637,55.245 70.29,55.245 70.137,55.093 70.137,54.889 70.29,54.737 70.637,54.737 70.985,54.737 71.137,54.585 71.137,54.381 70.985,54.229 70.637,54.229 70.29,54.229 70.137,54.077 70.137,53.873 70.29,53.721 70.637,53.721 70.985,53.721 71.137,53.569 71.137,53.365 70.985,53.213 70.637,53.213 70.29,53.213 70.137,53.061 70.137,52.857 70.29,52.705 70.637,52.705 70.985,52.705 71.137,52.553 71.137,52.349 70.985,52.197 70.637,52.197 70.29,52.197 70.137,52.045 70.137,51.841 70.29,51.689 70.637,51.689 70.985,51.689 71.137,51.537 71.137,51.333 70.985,51.181 70.637,51.181 70.29,51.181 70.137,51.029 70.137,50.825 70.29,50.673 70.637,50.673 70.985,50.673 71.137,50.521 71.137,50.317 70.985,50.165 70.637,50.165 70.29,50.165 70.137,50.013 70.137,49.809 70.29,49.657 70.637,49.657 70.985,49.657 71.137,49.505 71.137,49.301 70.985,49.149 70.637,49.149 70.29,49.149 70.137,48.997 70.137,48.793 70.29,48.641 70.485,48.641 70.637,48.489 70.637,47.904 70.637,30.759 82.5,18.897 v2(82.5,6.948)
  Bottom Layer w0.254: v2(82.5,6.948) P2.28@82.5,8.625
HS_3: P2.46 P4.6 | length 132
  Top Layer w0.254: P4.6@76.187,78.331 77.328,77.191 83.236,77.191 86.182,74.244 86.182,56.337 86.182,56.083 86.03,55.931 85.835,55.931 85.682,55.778 85.682,55.575 85.835,55.423 86.182,55.423 86.53,55.423 86.682,55.27 86.682,55.067 86.53,54.915 86.182,54.915 85.835,54.915 85.682,54.762 85.682,54.559 85.835,54.407 86.182,54.407 86.53,54.407 86.682,54.254 86.682,54.051 86.53,53.899 86.182,53.899 85.835,53.899 85.682,53.746 85.682,53.543 85.835,53.391 86.182,53.391 86.53,53.391 86.682,53.238 86.682,53.035 86.53,52.883 86.182,52.883 85.835,52.883 85.682,52.73 85.682,52.527 85.835,52.375 86.182,52.375 86.53,52.375 86.682,52.222 86.682,52.019 86.53,51.867 86.182,51.867 85.835,51.867 85.682,51.714 85.682,51.511 85.835,51.359 86.182,51.359 86.53,51.359 86.682,51.206 86.682,51.003 86.53,50.851 86.182,50.851 85.835,50.851 85.682,50.698 85.682,50.495 85.835,50.343 86.182,50.343 86.53,50.343 86.682,50.19 86.682,49.987 86.53,49.835 86.182,49.835 85.835,49.835 85.682,49.682 85.682,49.479 85.835,49.327 86.182,49.327 86.53,49.327 86.682,49.174 86.682,48.971 86.53,48.819 86.182,48.819 85.835,48.819 85.682,48.666 85.682,48.463 85.835,48.311 86.182,48.311 86.53,48.311 86.682,48.158 86.682,47.955 86.53,47.803 86.182,47.803 85.835,47.803 85.682,47.65 85.682,47.447 85.835,47.295 86.182,47.295 86.53,47.295 86.682,47.142 86.682,46.939 86.53,46.787 86.182,46.787 85.835,46.787 85.682,46.634 85.682,46.431 85.835,46.279 86.182,46.279 86.53,46.279 86.682,46.126 86.682,45.923 86.53,45.771 86.182,45.771 85.835,45.771 85.682,45.618 85.682,45.415 85.835,45.263 86.182,45.263 86.53,45.263 86.682,45.11 86.682,44.907 86.53,44.755 86.182,44.755 85.835,44.755 85.682,44.602 85.682,44.399 85.835,44.247 86.182,44.247 86.53,44.247 86.682,44.094 86.682,43.891 86.53,43.739 86.182,43.739 85.835,43.739 85.682,43.586 85.682,43.383 85.835,43.231 86.182,43.231 86.53,43.231 86.682,43.078 86.682,42.875 86.53,42.723 86.182,42.723 85.835,42.723 85.682,42.57 85.682,42.367 85.835,42.215 86.182,42.215 86.53,42.215 86.682,42.062 86.682,41.859 86.53,41.707 86.182,41.707 85.835,41.707 85.682,41.554 85.682,41.351 85.835,41.199 86.182,41.199 86.53,41.199 86.682,41.046 86.682,40.843 86.53,40.691 86.182,40.691 85.835,40.691 85.682,40.538 85.682,40.335 85.835,40.183 86.182,40.183 86.53,40.183 86.682,40.03 86.682,39.827 86.53,39.675 86.182,39.675 85.835,39.675 85.682,39.522 85.682,39.319 85.835,39.167 86.182,39.167 86.53,39.167 86.682,39.014 86.682,38.811 86.53,38.659 86.182,38.659 85.835,38.659 85.682,38.506 85.682,38.303 85.835,38.151 86.182,38.151 86.53,38.151 86.682,37.998 86.682,37.795 86.53,37.643 86.182,37.643 85.835,37.643 85.682,37.49 85.682,37.287 85.835,37.135 86.182,37.135 86.53,37.135 86.682,36.982 86.682,36.779 86.53,36.627 86.182,36.627 85.835,36.627 85.682,36.474 85.682,36.271 85.835,36.119 86.182,36.119 86.53,36.119 86.682,35.966 86.682,35.763 86.53,35.611 86.182,35.611 85.835,35.611 85.682,35.458 85.682,35.255 85.835,35.103 86.182,35.103 86.53,35.103 86.682,34.95 86.682,34.747 86.53,34.595 86.182,34.595 85.835,34.595 85.682,34.442 85.682,34.239 85.835,34.087 86.182,34.087 86.53,34.087 86.682,33.934 86.682,33.731 86.53,33.579 86.182,33.579 85.835,33.579 85.682,33.426 85.682,33.223 85.835,33.071 86.182,33.071 86.53,33.071 86.682,32.918 86.682,32.715 86.53,32.563 86.182,32.563 85.835,32.563 85.682,32.41 85.682,32.207 85.835,32.055 86.182,32.055 86.53,32.055 86.682,31.902 86.682,31.699 86.53,31.547 86.182,31.547 85.835,31.547 85.682,31.394 85.682,31.191 85.835,31.039 86.182,31.039 86.53,31.039 86.682,30.886 86.682,30.683 86.53,30.531 86.182,30.531 85.835,30.531 85.682,30.378 85.682,30.175 85.835,30.023 86.182,30.023 86.53,30.023 86.682,29.87 86.682,29.667 86.53,29.515 86.182,29.515 85.835,29.515 85.682,29.362 85.682,29.159 85.835,29.007 86.182,29.007 86.53,29.007 86.682,28.854 86.682,28.651 86.53,28.499 86.182,28.499 85.835,28.499 85.682,28.346 85.682,28.143 85.835,27.991 86.182,27.991 86.53,27.991 86.682,27.838 86.682,27.635 86.53,27.483 86.182,27.483 85.835,27.483 85.682,27.33 85.682,27.127 85.835,26.975 86.182,26.975 86.53,26.975 86.682,26.822 86.682,26.619 86.53,26.467 86.182,26.467 85.835,26.467 85.682,26.314 85.682,26.111 85.835,25.959 86.182,25.959 86.53,25.959 86.682,25.806 86.682,25.603 86.53,25.451 86.182,25.451 85.835,25.451 85.682,25.298 85.682,25.095 85.835,24.943 86.182,24.943 86.53,24.943 86.682,24.79 86.682,24.587 86.53,24.435 86.182,24.435 85.835,24.435 85.682,24.282 85.682,24.079 85.835,23.927 86.182,23.927 86.53,23.927 86.682,23.774 86.682,23.571 86.53,23.419 86.182,23.419 85.835,23.419 85.682,23.266 85.682,23.063 85.835,22.911 86.03,22.911 86.182,22.758 86.182,22.657 86.182,21.031 89.7,17.513 v2(89.7,10.302)
  Bottom Layer w0.254: P2.46@89.7,8.625 v2(89.7,10.302)
NetC1_1: C1.1 C2.2 F1.2 U1.3 | length 11.9
  Bottom Layer w0.508: C2.2@7.036,31.42 C1.1@7.036,33.452 U1.3@9.308,33.451 U1.3@9.308,33.451 9.308,27.497 F1.2@10.439,26.365
PCLK_1: P1.7 P2.11 | length 132.3
  Bottom Layer w0.254: P1.7@28.727,30.871 29.764,31.908 29.836,31.979 29.836,32.195 29.698,32.333 29.698,32.548 29.841,32.692 30.057,32.692 30.303,32.446 30.548,32.201 30.764,32.201 30.908,32.344 30.908,32.56 30.662,32.806 30.416,33.051 30.416,33.267 30.56,33.411 30.775,33.411 31.021,33.165 31.267,32.919 31.482,32.919 31.626,33.063 31.626,33.278 31.38,33.524 31.134,33.77 31.134,33.985 31.278,34.129 31.494,34.129 31.739,33.883 31.985,33.637 32.201,33.637 32.344,33.781 32.344,33.997 32.099,34.242 31.853,34.488 31.853,34.704 31.996,34.847 32.212,34.847 32.458,34.602 32.704,34.356 32.919,34.356 33.063,34.499 33.063,34.715 32.817,34.961 32.571,35.207 32.571,35.422 32.715,35.566 32.93,35.566 33.176,35.32 33.422,35.074 33.638,35.074 33.781,35.218 33.781,35.433 33.535,35.679 33.29,35.925 33.29,36.141 33.433,36.284 33.649,36.284 33.895,36.038 34.14,35.793 34.356,35.793 34.5,35.936 34.5,36.152 34.254,36.398 34.008,36.643 34.008,36.859 34.152,37.003 34.367,37.003 34.613,36.757 34.859,36.511 35.074,36.511 35.218,36.655 35.218,36.87 34.972,37.116 34.726,37.362 34.726,37.577 34.87,37.721 35.086,37.721 35.331,37.475 35.577,37.229 35.793,37.229 35.936,37.373 35.936,37.589 35.691,37.834 35.445,38.08 35.445,38.296 35.589,38.439 35.804,38.439 36.05,38.194 36.296,37.948 36.511,37.948 36.655,38.092 36.655,38.307 36.409,38.553 36.163,38.799 36.163,39.014 36.307,39.158 36.523,39.158 36.768,38.912 37.014,38.666 37.23,38.666 37.373,38.81 37.373,39.026 37.128,39.271 36.882,39.517 36.882,39.733 37.025,39.876 37.241,39.876 37.379,39.738 37.594,39.738 37.846,39.99 37.846,40.244 37.846,40.599 37.998,40.752 38.194,40.752 38.346,40.904 38.346,41.107 38.194,41.26 37.846,41.26 37.498,41.26 37.346,41.412 37.346,41.615 37.498,41.768 37.846,41.768 38.194,41.768 38.346,41.92 38.346,42.123 38.194,42.276 37.846,42.276 37.498,42.276 37.346,42.428 37.346,42.631 37.498,42.784 37.846,42.784 38.194,42.784 38.346,42.936 38.346,43.139 38.194,43.292 37.846,43.292 37.498,43.292 37.346,43.444 37.346,43.647 37.498,43.8 37.846,43.8 38.194,43.8 38.346,43.952 38.346,44.155 38.194,44.308 37.846,44.308 37.498,44.308 37.346,44.46 37.346,44.663 37.498,44.816 37.846,44.816 38.194,44.816 38.346,44.968 38.346,45.171 38.194,45.324 37.846,45.324 37.498,45.324 37.346,45.476 37.346,45.679 37.498,45.832 37.846,45.832 38.194,45.832 38.346,45.984 38.346,46.187 38.194,46.34 37.846,46.34 37.498,46.34 37.346,46.492 37.346,46.695 37.498,46.848 37.694,46.848 37.846,47 37.846,47.32 37.846,47.676 39.446,49.276 39.929,49.276 40.03,49.276 40.183,49.428 40.183,49.624 40.335,49.776 40.538,49.776 40.691,49.624 40.691,49.276 40.691,48.928 40.843,48.776 41.046,48.776 41.199,48.928 41.199,49.276 41.199,49.624 41.351,49.776 41.554,49.776 41.707,49.624 41.707,49.276 41.707,48.928 41.859,48.776 42.062,48.776 42.215,48.928 42.215,49.276 42.215,49.624 42.367,49.776 42.57,49.776 42.723,49.624 42.723,49.276 42.723,48.928 42.875,48.776 43.078,48.776 43.231,48.928 43.231,49.276 43.231,49.624 43.383,49.776 43.586,49.776 43.739,49.624 43.739,49.276 43.739,48.928 43.891,48.776 44.094,48.776 44.247,48.928 44.247,49.276 44.247,49.624 44.399,49.776 44.602,49.776 44.755,49.624 44.755,49.276 44.755,48.928 44.907,48.776 45.11,48.776 45.263,48.928 45.263,49.276 45.263,49.624 45.415,49.776 45.618,49.776 45.771,49.624 45.771,49.276 45.771,48.928 45.923,48.776 46.126,48.776 46.279,48.928 46.279,49.276 46.279,49.624 46.431,49.776 46.634,49.776 46.787,49.624 46.787,49.276 46.787,48.928 46.939,48.776 47.142,48.776 47.295,48.928 47.295,49.276 47.295,49.624 47.447,49.776 47.65,49.776 47.803,49.624 47.803,49.276 47.803,48.928 47.955,48.776 48.158,48.776 48.311,48.928 48.311,49.276 48.311,49.624 48.463,49.776 48.666,49.776 48.819,49.624 48.819,49.276 48.819,48.928 48.971,48.776 49.174,48.776 49.327,48.928 49.327,49.276 49.327,49.624 49.479,49.776 49.682,49.776 49.835,49.624 49.835,49.276 49.835,48.928 49.987,48.776 50.19,48.776 50.343,48.928 50.343,49.276 50.343,49.624 50.495,49.776 50.698,49.776 50.851,49.624 50.851,49.276 50.851,48.928 51.003,48.776 51.206,48.776 51.359,48.928 51.359,49.276 51.359,49.624 51.511,49.776 51.714,49.776 51.867,49.624 51.867,49.276 51.867,48.928 52.019,48.776 52.222,48.776 52.375,48.928 52.375,49.276 52.375,49.624 52.527,49.776 52.73,49.776 52.883,49.624 52.883,49.428 53.035,49.276 54.432,49.276 57.125,49.276 58.826,47.574 58.826,36.017 76.1,18.744 P2.11@76.1,12.425
PCLK_2: P2.29 P3.7 | length 132.4
  Bottom Layer w0.254: P3.7@28.727,80.871 37.874,80.871 41.097,77.648 41.097,74.981 55.905,60.173 71.298,60.173 73.965,57.506 73.965,47.015 73.965,46.076 73.812,45.923 73.617,45.923 73.465,45.771 73.465,45.568 73.617,45.415 73.965,45.415 74.312,45.415 74.465,45.263 74.465,45.06 74.312,44.907 73.965,44.907 73.617,44.907 73.465,44.755 73.465,44.552 73.617,44.399 73.965,44.399 74.312,44.399 74.465,44.247 74.465,44.044 74.312,43.891 73.965,43.891 73.617,43.891 73.465,43.739 73.465,43.536 73.617,43.383 73.965,43.383 74.312,43.383 74.465,43.231 74.465,43.028 74.312,42.875 73.965,42.875 73.617,42.875 73.465,42.723 73.465,42.52 73.617,42.367 73.965,42.367 74.312,42.367 74.465,42.215 74.465,42.012 74.312,41.859 73.965,41.859 73.617,41.859 73.465,41.707 73.465,41.504 73.617,41.351 73.965,41.351 74.312,41.351 74.465,41.199 74.465,40.996 74.312,40.843 73.965,40.843 73.617,40.843 73.465,40.691 73.465,40.488 73.617,40.335 73.965,40.335 74.312,40.335 74.465,40.183 74.465,39.98 74.312,39.827 73.965,39.827 73.617,39.827 73.465,39.675 73.465,39.472 73.617,39.319 73.965,39.319 74.312,39.319 74.465,39.167 74.465,38.964 74.312,38.811 73.965,38.811 73.617,38.811 73.465,38.659 73.465,38.456 73.617,38.303 73.965,38.303 74.312,38.303 74.465,38.151 74.465,37.948 74.312,37.795 73.965,37.795 73.617,37.795 73.465,37.643 73.465,37.44 73.617,37.287 73.965,37.287 74.312,37.287 74.465,37.135 74.465,36.932 74.312,36.779 73.965,36.779 73.617,36.779 73.465,36.627 73.465,36.424 73.617,36.271 73.965,36.271 74.312,36.271 74.465,36.119 74.465,35.916 74.312,35.763 73.965,35.763 73.617,35.763 73.465,35.611 73.465,35.408 73.617,35.255 73.965,35.255 74.312,35.255 74.465,35.103 74.465,34.9 74.312,34.747 73.965,34.747 73.617,34.747 73.465,34.595 73.465,34.392 73.617,34.239 73.965,34.239 74.312,34.239 74.465,34.087 74.465,33.884 74.312,33.731 73.965,33.731 73.617,33.731 73.465,33.579 73.465,33.376 73.617,33.223 73.965,33.223 74.312,33.223 74.465,33.071 74.465,32.868 74.312,32.715 73.965,32.715 73.617,32.715 73.465,32.563 73.465,32.36 73.617,32.207 73.965,32.207 74.312,32.207 74.465,32.055 74.465,31.852 74.312,31.699 73.965,31.699 73.617,31.699 73.465,31.547 73.465,31.344 73.617,31.191 73.965,31.191 74.312,31.191 74.465,31.039 74.465,30.836 74.312,30.683 73.965,30.683 73.617,30.683 73.465,30.531 73.465,30.328 73.617,30.175 73.965,30.175 74.312,30.175 74.465,30.023 74.465,29.82 74.312,29.667 73.965,29.667 73.617,29.667 73.465,29.515 73.465,29.312 73.617,29.159 73.812,29.159 73.965,29.007 73.965,28.905 73.965,27.838 83.3,18.503 P2.29@83.3,12.425
PCLK_3: P2.47 P4.7 | length 132.1
  Bottom Layer w0.254: P4.7@78.727,80.871 85.397,80.871 89.611,76.657 89.611,76.073 89.611,75.971 89.764,75.819 89.959,75.819 90.111,75.667 90.111,75.463 89.959,75.311 89.611,75.311 89.264,75.311 89.111,75.159 89.111,74.955 89.264,74.803 89.611,74.803 89.959,74.803 90.111,74.651 90.111,74.447 89.959,74.295 89.611,74.295 89.264,74.295 89.111,74.143 89.111,73.939 89.264,73.787 89.611,73.787 89.959,73.787 90.111,73.635 90.111,73.431 89.959,73.279 89.611,73.279 89.264,73.279 89.111,73.127 89.111,72.923 89.264,72.771 89.611,72.771 89.959,72.771 90.111,72.619 90.111,72.415 89.959,72.263 89.611,72.263 89.264,72.263 89.111,72.111 89.111,71.907 89.264,71.755 89.611,71.755 89.959,71.755 90.111,71.603 90.111,71.399 89.959,71.247 89.611,71.247 89.264,71.247 89.111,71.095 89.111,70.891 89.264,70.739 89.611,70.739 89.959,70.739 90.111,70.587 90.111,70.383 89.959,70.231 89.611,70.231 89.264,70.231 89.111,70.079 89.111,69.875 89.264,69.723 89.611,69.723 89.959,69.723 90.111,69.571 90.111,69.367 89.959,69.215 89.611,69.215 89.264,69.215 89.111,69.063 89.111,68.859 89.264,68.707 89.611,68.707 89.959,68.707 90.111,68.555 90.111,68.351 89.959,68.199 89.611,68.199 89.264,68.199 89.111,68.047 89.111,67.843 89.264,67.691 89.611,67.691 89.959,67.691 90.111,67.539 90.111,67.335 89.959,67.183 89.611,67.183 89.264,67.183 89.111,67.031 89.111,66.827 89.264,66.675 89.611,66.675 89.959,66.675 90.111,66.523 90.111,66.319 89.959,66.167 89.611,66.167 89.264,66.167 89.111,66.015 89.111,65.811 89.264,65.659 89.611,65.659 89.959,65.659 90.111,65.507 90.111,65.303 89.959,65.151 89.611,65.151 89.264,65.151 89.111,64.999 89.111,64.795 89.264,64.643 89.611,64.643 89.959,64.643 90.111,64.491 90.111,64.287 89.959,64.135 89.611,64.135 89.264,64.135 89.111,63.983 89.111,63.779 89.264,63.627 89.611,63.627 89.959,63.627 90.111,63.475 90.111,63.271 89.959,63.119 89.611,63.119 89.264,63.119 89.111,62.967 89.111,62.763 89.264,62.611 89.611,62.611 89.959,62.611 90.111,62.459 90.111,62.255 89.959,62.103 89.611,62.103 89.264,62.103 89.111,61.951 89.111,61.747 89.264,61.595 89.611,61.595 89.959,61.595 90.111,61.443 90.111,61.239 89.959,61.087 89.611,61.087 89.264,61.087 89.111,60.935 89.111,60.731 89.264,60.579 89.611,60.579 89.959,60.579 90.111,60.427 90.111,60.223 89.959,60.071 89.611,60.071 89.264,60.071 89.111,59.919 89.111,59.715 89.264,59.563 89.611,59.563 89.959,59.563 90.111,59.411 90.111,59.207 89.959,59.055 89.611,59.055 89.264,59.055 89.111,58.903 89.111,58.699 89.264,58.547 89.611,58.547 89.959,58.547 90.111,58.395 90.111,58.191 89.959,58.039 89.611,58.039 89.264,58.039 89.111,57.887 89.111,57.683 89.264,57.531 89.611,57.531 89.959,57.531 90.111,57.379 90.111,57.175 89.959,57.023 89.611,57.023 89.264,57.023 89.111,56.871 89.111,56.667 89.264,56.515 89.611,56.515 89.959,56.515 90.111,56.363 90.111,56.159 89.959,56.007 89.611,56.007 89.264,56.007 89.111,55.855 89.111,55.651 89.264,55.499 89.611,55.499 89.959,55.499 90.111,55.347 90.111,55.143 89.959,54.991 89.611,54.991 89.264,54.991 89.111,54.839 89.111,54.635 89.264,54.483 89.611,54.483 89.959,54.483 90.111,54.331 90.111,54.127 89.959,53.975 89.611,53.975 89.264,53.975 89.111,53.823 89.111,53.619 89.264,53.467 89.611,53.467 89.959,53.467 90.111,53.315 90.111,53.111 89.959,52.959 89.611,52.959 89.264,52.959 89.111,52.807 89.111,52.603 89.264,52.451 89.611,52.451 89.959,52.451 90.111,52.299 90.111,52.095 89.959,51.943 89.611,51.943 89.264,51.943 89.111,51.791 89.111,51.587 89.264,51.435 89.611,51.435 89.959,51.435 90.111,51.283 90.111,51.079 89.959,50.927 89.611,50.927 89.264,50.927 89.111,50.775 89.111,50.571 89.264,50.419 89.611,50.419 89.959,50.419 90.111,50.267 90.111,50.063 89.959,49.911 89.611,49.911 89.264,49.911 89.111,49.759 89.111,49.555 89.264,49.403 89.611,49.403 89.959,49.403 90.111,49.251 90.111,49.047 89.959,48.895 89.611,48.895 89.264,48.895 89.111,48.743 89.111,48.539 89.264,48.387 89.611,48.387 89.959,48.387 90.111,48.235 90.111,48.031 89.959,47.879 89.611,47.879 89.264,47.879 89.111,47.727 89.111,47.523 89.264,47.371 89.611,47.371 89.959,47.371 90.111,47.219 90.111,47.015 89.959,46.863 89.611,46.863 89.264,46.863 89.111,46.711 89.111,46.507 89.264,46.355 89.611,46.355 89.959,46.355 90.111,46.203 90.111,45.999 89.959,45.847 89.611,45.847 89.264,45.847 89.111,45.695 89.111,45.491 89.264,45.339 89.611,45.339 89.959,45.339 90.111,45.187 90.111,44.983 89.959,44.831 89.611,44.831 89.264,44.831 89.111,44.679 89.111,44.475 89.264,44.323 89.611,44.323 89.959,44.323 90.111,44.171 90.111,43.967 89.959,43.815 89.611,43.815 89.264,43.815 89.111,43.663 89.111,43.459 89.264,43.307 89.611,43.307 89.959,43.307 90.111,43.155 90.111,42.951 89.959,42.799 89.611,42.799 89.264,42.799 89.111,42.647 89.111,42.443 89.264,42.291 89.611,42.291 89.959,42.291 90.111,42.139 90.111,41.935 89.959,41.783 89.764,41.783 89.611,41.631 89.611,38.456 89.611,21.59 90.5,20.701 P2.47@90.5,12.425
PWDN_1: P1.18
PWDN_2: P3.18
PWDN_3: P4.18
RST_1: P1.17
RST_2: P3.17
RST_3: P4.17